# EAGLE board Smart GreenHouse Automation (EAGLE 9.7.0)

Size 324.87 x 165.13 mm. Coordinates in mm from the lower left corner, seen from the top.
Outline: 0,0 324.87,0 324.87,165.13 0,165.13 0,0
Copper layers (1*16): Top 0.035mm / dielectric 1.5mm / Bottom 0.035mm
Design rules "default": minimum track width 6mil, minimum drill 0.35mm, track to track 6mil, track to pad 6mil, pad to pad 6mil, via to via 6mil, smd to smd 6mil, copper to edge 40mil, drill to drill 6mil, minimum pad ring 10mil, minimum via ring 8mil, stop-mask expansion 4mil, vias tented up to drill 0mil, thermal gap 10mil

## Footprints (pad centres in the part's own frame; a part is rotated, then mirrored left to right if it is on the bottom)
BATTERY-GENERIC = drill 1.118 pad 3.15 octagon: + 2.54,0; - -2.54,0
HC-SR04 = drill 1.016 long: 1 -3.81,0; 2 -1.27,0; 3 1.27,0; 4 3.81,0
1X02 = drill 1.016 long: 1 -1.27,0; 2 1.27,0
MOTOR = drill 1.118 pad 3.15 octagon: + 2.54,0; - -2.54,0
PIEZO = drill 1 pad 1.6: 1 -3.5,0; 2 3.5,0
RESAD1016W63L850D250B = drill 0.83 pad 1.43: 1 -5.08,0; 2 5.08,0
GL5528 = drill 0.8 pad 1.4: 1 -1.702,0; 2 1.702,0
HA-06-SM065 = drill 1 pad 1.676: 1 -2.54,-2.54; 2 0,2.54; 3 2.54,-2.54
TO92 = drill 0.813 octagon: 1 -1.27,0; 2 0,1.905; 3 1.27,0
ARDUINO-UNO-R3-SHIELD = drill 1.016 pad 1.88: 3.3V 24.13,-2.54; 5V 24.13,0; A0 24.13,12.7; A1 24.13,15.24; A2 24.13,17.78; A3 24.13,20.32; A4 24.13,22.86; A5 24.13,25.4; AREF -24.13,-13.97; D2 -24.13,20.32; D3 -24.13,17.78; D4 -24.13,15.24; D5 -24.13,12.7; D6 -24.13,10.16; D7 -24.13,7.62; D8 -24.13,3.81; D9 -24.13,1.27; D10 -24.13,-1.27; D11 -24.13,-3.81; D12 -24.13,-6.35; D13 -24.13,-8.89; GND@0 24.13,2.54; GND@1 24.13,5.08; GND@2 -24.13,-11.43; IOREF 24.13,-7.62; NC 24.13,-10.16; RES 24.13,-5.08; RX -24.13,25.4; SCL -24.13,-19.05; SDA -24.13,-16.51; TX -24.13,22.86; VIN 24.13,7.62
JHD-162A = drill 1.016 long: 1 -19.05,0; 2 -16.51,0; 3 -13.97,0; 4 -11.43,0; 5 -8.89,0; 6 -6.35,0; 7 -3.81,0; 8 -1.27,0; 9 1.27,0; 10 3.81,0; 11 6.35,0; 12 8.89,0; 13 11.43,0; 14 13.97,0; 15 16.51,0; 16 19.05,0

## Placement (x,y rotation side)
BAT1  9V  [BATTERY-GENERIC]  8.33,96.76 90 top
DIST1  DISTANCE-SENSOR-4PINHC-SR04  [HC-SR04]  185.54,126.28 0 top
L1  LIGHTBULB  [1X02]  134.99,158.86 0 top
M1  MOTOR_HDR  [MOTOR]  8.26,127.54 90 top
PIEZO1  PIEZO  [PIEZO]  243.32,146.57 0 top
R1  1k  [RESAD1016W63L850D250B]  92.1,74.97 0 top
R3  PHOTOCELL_GL5528  [GL5528]  142.36,123.74 0 top
R4  4.7k  [RESAD1016W63L850D250B]  141.09,136.44 90 top
R5  180  [RESAD1016W63L850D250B]  285.75,44.12 90 top
R6  220  [RESAD1016W63L850D250B]  136.26,153.78 90 top
RPOT1  250k  [HA-06-SM065]  227.33,23.8 0 top
T1  PNP  [TO92]  43.68,122.47 0 top
U1  ARDUINO-UNO-R3-SHIELD  [ARDUINO-UNO-R3-SHIELD]  155.7,48.8 270 top
U2  TMP36GT9Z_TO92  [TO92]  130.93,123.74 0 top
U3  LCD-16X2JHD-162A  [JHD-162A]  269.24,36.63 0 top

## Library data of the parts
BAT1 DIST1 L1 M1 PIEZO1 R1 R3-R6 RPOT1 U1-U3 = Tinkercad
T1 = Tinkercad; CATEGORY: Transistor; SUB-CATEGORY: BJT; TYPE: PNP

## Nets
BAT1+: BAT1.+ M1.+
BAT1-: BAT1.- T1.1
L1_2: L1.2 R6.2
T1_B: R1.1 T1.2
U1_5V: DIST1.1 R3.2 R5.2 RPOT1.1 U1.5V U2.3 U3.2
U1_A0: U1.A0 U2.2
U1_A1: R3.1 R4.1 U1.A1
U1_D2: U1.D2 U3.14
U1_D3: U1.D3 U3.13
U1_D4: U1.D4 U3.12
U1_D5: U1.D5 U3.11
U1_D6: U1.D6 U3.6
U1_D7: U1.D7 U3.4
U1_D8: PIEZO1.2 U1.D8
U1_D9: M1.- T1.3 U1.D9
U1_D10: L1.1 U1.D10
U1_D12: DIST1.2 U1.D12
U1_D13: DIST1.3 U1.D13
U1_GND: DIST1.4 PIEZO1.1 R1.2 R4.2 R6.1 RPOT1.3 U1.GND@0 U1.GND@1 U1.GND@2 U2.1 U3.1 U3.5 U3.16
U3_LED+: R5.1 U3.15
U3_VO: RPOT1.2 U3.3

## Tracks (layer width: path | path; a pad name or v marks a point on that pad's centre or on a via)
BAT1+  (1 unrouted)
BAT1-  (1 unrouted)
L1_2  (1 unrouted)
T1_B  (1 unrouted)
U1_5V  (6 unrouted)
U1_A0  (1 unrouted)
U1_A1  (2 unrouted)
U1_D2  (1 unrouted)
U1_D3  (1 unrouted)
U1_D4  (1 unrouted)
U1_D5  (1 unrouted)
U1_D6  (1 unrouted)
U1_D7  (1 unrouted)
U1_D8  (1 unrouted)
U1_D9  (2 unrouted)
U1_D10  (1 unrouted)
U1_D12  (1 unrouted)
U1_D13  (1 unrouted)
U1_GND  (12 unrouted)
U3_LED+  (1 unrouted)
U3_VO  (1 unrouted)